# EAGLE board CT_schematic (EAGLE 7.6.0)

Size 100 x 80 mm. Coordinates in mm from the lower left corner, seen from the top.
Outline: 0,0 100,0 100,80 0,80 0,0
Copper layers (1*16): Top 0.035mm / dielectric 1.5mm / Bottom 0.035mm
Design rules "default": minimum track width 10mil, minimum drill 24mil, track to track 8mil, track to pad 8mil, pad to pad 8mil, via to via 8mil, smd to smd 8mil, copper to edge 40mil, drill to drill 8mil, minimum pad ring 10mil, minimum via ring 8mil, stop-mask expansion 4mil, vias tented up to drill 0mil, thermal gap 10mil

## Footprints (pad centres in the part's own frame; a part is rotated, then mirrored left to right if it is on the bottom)
C0603 = smd 0.8 x 0.8: 1 -0.762,0; 2 0.762,0
C0402 = smd 0.5 x 0.5: 1 -0.508,0; 2 0.508,0
C1210 = smd 1.2 x 2.5: 1 -1.524,0; 2 1.524,0
C0805 = smd 1.2 x 1.3: 1 -1.016,0; 2 1.016,0
C1206 = smd 1.3 x 1.6: 1 -1.524,0; 2 1.524,0
L0603 = smd 0.8 x 0.8: 1 -0.762,0; 2 0.762,0
L0806 = smd 1.016 x 1.524: 1 -0.889,0; 2 0.889,0
R0603 = smd 0.8 x 0.8: 1 -0.762,0; 2 0.762,0
LQFP144 = smd 0.35 x 1.35: 1 -8.75,-10.625; 2 -8.25,-10.625; 3 -7.75,-10.625; 4 -7.25,-10.625; 5 -6.75,-10.625; 6 -6.25,-10.625; 7 -5.75,-10.625; 8 -5.25,-10.625; 9 -4.75,-10.625; 10 -4.25,-10.625; 11 -3.75,-10.625; 12 -3.25,-10.625; 13 -2.75,-10.62; 14 -2.25,-10.625; 15 -1.75,-10.625; 16 -1.25,-10.625; 17 -0.75,-10.625; 18 -0.25,-10.625; 19 0.25,-10.625; 20 0.75,-10.625; 21 1.25,-10.625; 22 1.75,-10.625; 23 2.25,-10.625; 24 2.75,-10.62; 25 3.25,-10.625; 26 3.75,-10.625; 27 4.25,-10.625; 28 4.75,-10.625; 29 5.25,-10.625; 30 5.75,-10.625; 31 6.25,-10.625; 32 6.75,-10.625; 33 7.25,-10.625; 34 7.75,-10.625; 35 8.25,-10.625; 36 8.75,-10.625; 73 8.75,10.625; 74 8.25,10.625; 75 7.75,10.625; 76 7.25,10.625; 77 6.75,10.625; 78 6.25,10.625; 79 5.75,10.625; 80 5.25,10.625; 81 4.75,10.625; 82 4.25,10.625; 83 3.75,10.625; 84 3.25,10.625; 85 2.75,10.625; 86 2.25,10.625; 87 1.75,10.625; 88 1.25,10.625; 89 0.75,10.625; 90 0.25,10.625; 91 -0.25,10.625; 92 -0.75,10.625; 93 -1.25,10.625; 94 -1.75,10.625; 95 -2.25,10.625; 96 -2.75,10.625; 97 -3.25,10.625; 98 -3.75,10.625; 99 -4.25,10.625; 100 -4.75,10.625; 101 -5.25,10.625; 102 -5.75,10.625; 103 -6.25,10.625; 104 -6.75,10.625; 105 -7.25,10.625; 106 -7.75,10.625; 107 -8.25,10.625; 108 -8.75,10.625 | smd 1.35 x 0.35: 37 10.625,-8.75; 38 10.625,-8.25; 39 10.625,-7.75; 40 10.625,-7.25; 41 10.625,-6.75; 42 10.625,-6.25; 43 10.625,-5.75; 44 10.625,-5.25; 45 10.625,-4.75; 46 10.625,-4.25; 47 10.625,-3.75; 48 10.625,-3.25; 49 10.625,-2.75; 50 10.625,-2.25; 51 10.625,-1.75; 52 10.625,-1.25; 53 10.625,-0.75; 54 10.625,-0.25; 55 10.625,0.25; 56 10.625,0.75; 57 10.625,1.25; 58 10.625,1.75; 59 10.625,2.25; 60 10.625,2.75; 61 10.625,3.25; 62 10.625,3.75; 63 10.625,4.25; 64 10.625,4.75; 65 10.625,5.25; 66 10.625,5.75; 67 10.625,6.25; 68 10.625,6.75; 69 10.625,7.25; 70 10.625,7.75; 71 10.625,8.25; 72 10.625,8.75; 109 -10.625,8.75; 110 -10.625,8.25; 111 -10.625,7.75; 112 -10.625,7.25; 113 -10.625,6.75; 114 -10.625,6.25; 115 -10.625,5.75; 116 -10.625,5.25; 117 -10.625,4.75; 118 -10.625,4.25; 119 -10.625,3.75; 120 -10.625,3.25; 121 -10.625,2.75; 122 -10.625,2.25; 123 -10.625,1.75; 124 -10.625,1.25; 125 -10.625,0.75; 126 -10.625,0.25; 127 -10.625,-0.25; 128 -10.625,-0.75; 129 -10.625,-1.25; 130 -10.625,-1.75; 131 -10.625,-2.25; 132 -10.625,-2.75; 133 -10.625,-3.25; 134 -10.625,-3.75; 135 -10.625,-4.25; 136 -10.625,-4.75; 137 -10.625,-5.25; 138 -10.625,-5.75; 139 -10.625,-6.25; 140 -10.625,-6.75; 141 -10.625,-7.25; 142 -10.625,-7.75; 143 -10.625,-8.25; 144 -10.625,-8.75
LGA-16 = smd 1.5 x 0.4: 1 -2.1,0.975; 2 -2.1,0.325; 3 -2.1,-0.325; 4 -2.1,-0.975; 9 2.1,-0.975; 10 2.1,-0.325; 11 2.1,0.325; 12 2.1,0.975 | smd 0.4 x 1.5: 5 -0.975,-2.1; 6 -0.325,-2.1; 7 0.325,-2.1; 8 0.975,-2.1; 13 0.975,2.1; 14 0.325,2.1; 15 -0.325,2.1; 16 -0.975,2.1
VFBGA-63 = smd 0.4 x 0.4: A1 -3.6,4.4; A2 -2.8,4.4; A9 2.8,4.4; A10 3.6,4.4; B1 -3.6,3.6; B9 2.8,3.6; B10 3.6,3.6; C3 -2,2.8; C4 -1.2,2.8; C5 -0.4,2.8; C6 0.4,2.8; C7 1.2,2.8; C8 2,2.8; D3 -2,2; D4 -1.2,2; D5 -0.4,2; D6 0.4,2; D7 1.2,2; D8 2,2; E3 -2,1.2; E4 -1.2,1.2; E5 -0.4,1.2; E6 0.4,1.2; E7 1.2,1.2; E8 2,1.2; F3 -2,0.4; F4 -1.2,0.4; F5 -0.4,0.4; F6 0.4,0.4; F7 1.2,0.4; F8 2,0.4; G3 -2,-0.4; G4 -1.2,-0.4; G5 -0.4,-0.4; G6 0.4,-0.4; G7 1.2,-0.4; G8 2,-0.4; H3 -2,-1.2; H4 -1.2,-1.2; H5 -0.4,-1.2; H6 0.4,-1.2; H7 1.2,-1.2; H8 2,-1.2; J3 -2,-2; J4 -1.2,-2; J5 -0.4,-2; J6 0.4,-2; J7 1.2,-2; J8 2,-2; K3 -2,-2.8; K4 -1.2,-2.8; K5 -0.4,-2.8; K6 0.4,-2.8; K7 1.2,-2.8; K8 2,-2.8; L1 -3.6,-3.6; L2 -2.8,-3.6; L9 2.8,-3.6; L10 3.6,-3.6; M1 -3.6,-4.4; M2 -2.8,-4.4; M9 2.8,-4.4; M10 3.6,-4.4
FCI_10118193-0001LF = smd 0.4 x 1.35: 1 -1.3,2.675; 2 -0.65,2.675; 3 0,2.675; 4 0.65,2.675; 5 1.3,2.675 | smd 1.6 x 1.4: 6 -3.2,2.45; 7 3.2,2.45 | smd 1.9 x 1.9: 8 -1.2,0; 9 1.2,0 | hole 0.5: -3.3,0; 3.3,0
SOT143B = smd 1 x 0.7: 1 -0.75,-1 | smd 0.6 x 0.7: 2 0.95,-1; 3 0.95,1; 4 -0.95,1
QFN-28 = smd 0.813 x 0.305: 1 -2.451,1.5; 2 -2.451,1; 3 -2.451,0.5; 4 -2.451,0; 5 -2.451,-0.5; 6 -2.451,-1; 7 -2.451,-1.5; 15 2.451,-1.5; 16 2.451,-1; 17 2.451,-0.5; 18 2.451,0; 19 2.451,0.5; 20 2.451,1; 21 2.451,1.5 | smd 0.305 x 0.813: 8 -1.5,-2.451; 9 -1,-2.451; 10 -0.5,-2.451; 11 0,-2.451; 12 0.5,-2.451; 13 1,-2.451; 14 1.5,-2.451; 22 1.5,2.451; 23 1,2.451; 24 0.5,2.451; 25 0,2.451; 26 -0.5,2.451; 27 -1,2.451; 28 -1.5,2.451 | smd 3.607 x 3.607: 29 0,0
SJ-43515TS-SMT-TR = smd 2.2 x 3: 1 0.6,-7.4; 4 3.4,-7.4 | smd 3 x 3: 2 12.8,-7.4; 5 17,-3 | smd 2 x 3: 3 5.3,0; 6 2.5,0 | drill 1.8: P$7 4.5,-3.69; P$8 11.54,-3.69
ASEK = smd 1.4 x 1: 1 -1.1,-0.8; 2 1.1,-0.8; 3 1.1,0.8; 4 -1.1,0.8
ASFL1 = smd 1.7 x 1.5: 1 -1.27,-1.1; 2 1.27,-1.1; 3 1.27,1.1; 4 -1.27,1.1
WSON-8 = smd 0.3 x 0.6: 1 -0.75,0; 2 0.05,0; 3 0.85,0; 4 1.65,0; 5 1.65,3.8; 6 0.85,3.8; 7 0.05,3.8; 8 -0.75,3.8 | smd 3 x 2.6: PAD 0.45,1.9
TSOT-23-5 = smd 1.3 x 0.62: 1 -1.31,0.95; 2 -1.31,0; 3 -1.31,-0.95; 4 1.31,-0.95; 5 1.31,0.95
DFN8_2X3MC = smd 0.813 x 0.305: 1 -1.398,0.75; 2 -1.398,0.25; 3 -1.398,-0.25; 4 -1.398,-0.75; 5 1.398,-0.75; 6 1.398,-0.25; 7 1.398,0.25; 8 1.398,0.75 | smd 1.753 x 1.549: 9 0,0
JST-2-SMD = smd 1 x 4.6: 1 -1,-3.7; 2 1,-3.7 | smd 1.6 x 3.4: NC1 -3.4,1.5; NC2 3.4,1.5
SON-6 = smd 0.55 x 0.3: 1 -0.355,0.5 | smd 0.52 x 0.3: 2 -0.37,0; 3 -0.37,-0.5; 4 0.37,-0.5; 5 0.37,0; 6 0.37,0.5
SW_4-1437565-2 = smd 1.4 x 2.1: 1 -2.23,4.55; 2 -2.23,-4.55; 3 2.23,4.55; 4 2.23,-4.55
LGM67K-G1J2-24-Z = smd 0.8 x 1.4: A -2,0; C 0,0
NC7SZ125M5X = smd 1.3 x 0.7: 1 -1.3,0.95; 2 -1.3,0; 3 -1.3,-0.95; 4 1.3,-0.95; 5 1.3,0.95

## Placement (x,y rotation side)
C1  1e-06  [C0603]  -26.67,77.47 0 top  (outside the outline)
C2  1e-07  [C0603]  -30.48,77.47 0 top  (outside the outline)
C3  1e-07  [C0603]  -34.29,77.47 0 top  (outside the outline)
C4  1e-07  [C0603]  -38.1,77.47 0 top  (outside the outline)
C5  1e-07  [C0603]  -41.91,77.47 0 top  (outside the outline)
C6  1e-07  [C0603]  -45.72,77.47 0 top  (outside the outline)
C7  1e-07  [C0603]  -49.53,77.47 0 top  (outside the outline)
C8  1e-07  [C0603]  -53.34,77.47 0 top  (outside the outline)
C9  1e-07  [C0603]  -57.15,77.47 0 top  (outside the outline)
C10  1e-07  [C0603]  -60.96,77.47 0 top  (outside the outline)
C11  1e-07  [C0603]  -64.77,77.47 0 top  (outside the outline)
C12  1e-07  [C0603]  -68.58,77.47 0 top  (outside the outline)
C13  1e-07  [C0603]  -72.39,77.47 0 top  (outside the outline)
C14  4.7e-06  [C0603]  -15.24,77.47 0 top  (outside the outline)
C15  1e-08  [C0603]  -76.2,77.47 0 top  (outside the outline)
C16  1e-06  [C0603]  -15.24,82.55 0 top  (outside the outline)
C17  1e-08  [C0402]  -45.72,82.55 0 top  (outside the outline)
C18  1e-08  [C0402]  -49.53,82.55 0 top  (outside the outline)
C19  1e-08  [C0402]  -53.34,82.55 0 top  (outside the outline)
C20  4.7e-07  [C0603]  -19.05,77.47 0 top  (outside the outline)
C21  1e-07  [C0402]  -57.15,82.55 0 top  (outside the outline)
C22  1e-07  [C0402]  -60.96,82.55 0 top  (outside the outline)
C23  1e-07  [C0402]  -64.77,82.55 0 top  (outside the outline)
C24  1e-07  [C0402]  -68.58,82.55 0 top  (outside the outline)
C25  2.2e-06  [C0603]  -22.86,77.47 0 top  (outside the outline)
C26  2.2e-05  [C1210]  -24.13,60.96 0 top  (outside the outline)
C27  2.2e-05  [C1210]  -30.48,60.96 0 top  (outside the outline)
C28  1e-09  [C0402]  -72.39,82.55 0 top  (outside the outline)
C29  1e-09  [C0402]  -76.2,82.55 0 top  (outside the outline)
C30  1e-07  [C0402]  -15.24,87.63 0 top  (outside the outline)
C31  1e-07  [C0402]  -19.05,87.63 0 top  (outside the outline)
C32  1e-07  [C0402]  -22.86,87.63 0 top  (outside the outline)
C33  1e-07  [C0402]  -26.67,87.63 0 top  (outside the outline)
C34  1e-07  [C0402]  -30.48,87.63 0 top  (outside the outline)
C35  1e-05  [C0805]  -60.96,60.96 0 top  (outside the outline)
C36  1e-05  [C0805]  -66.04,60.96 0 top  (outside the outline)
C37  1e-05  [C0805]  -71.12,60.96 0 top  (outside the outline)
C38  1e-05  [C0805]  -76.2,60.96 0 top  (outside the outline)
C39  1e-05  [C0805]  -15.24,67.31 0 top  (outside the outline)
C40  1e-08  [C0402]  -34.29,87.63 0 top  (outside the outline)
C41  1e-08  [C0402]  -38.1,87.63 0 top  (outside the outline)
C42  1e-08  [C0402]  -41.91,87.63 0 top  (outside the outline)
C43  1e-06  [C0603]  -19.05,82.55 0 top  (outside the outline)
C44  1e-05  [C0805]  -20.32,67.31 0 top  (outside the outline)
C45  1e-05  [C0805]  -25.4,67.31 0 top  (outside the outline)
C46  1e-05  [C0805]  -30.48,67.31 0 top  (outside the outline)
C47  1e-07  [C0402]  -45.72,87.63 0 top  (outside the outline)
C48  1e-05  [C1206]  -36.83,60.96 0 top  (outside the outline)
C49  1e-05  [C1206]  -43.18,60.96 0 top  (outside the outline)
C50  1e-08  [C0402]  -49.53,87.63 0 top  (outside the outline)
F1  240.0  [L0603]  -22.86,82.55 0 top  (outside the outline)
I1  1.5e-06  [L0806]  -49.53,60.96 0 top  (outside the outline)
R2  1000.0  [R0603]  -26.67,82.55 0 top  (outside the outline)
R4  4700.0  [R0603]  -30.48,82.55 0 top  (outside the outline)
R5  10000.0  [R0603]  -73.66,66.04 0 top  (outside the outline)
R6  10000.0  [R0603]  -78.74,66.04 0 top  (outside the outline)
R7  10000.0  [R0603]  -15.24,72.39 0 top  (outside the outline)
R8  10000.0  [R0603]  -20.32,72.39 0 top  (outside the outline)
R9  10000.0  [R0603]  -25.4,72.39 0 top  (outside the outline)
R10  10000.0  [R0603]  -30.48,72.39 0 top  (outside the outline)
R11  10000.0  [R0603]  -35.56,72.39 0 top  (outside the outline)
R12  10000.0  [R0603]  -40.64,72.39 0 top  (outside the outline)
R13  47000.0  [R0603]  -45.72,72.39 0 top  (outside the outline)
R14  47000.0  [R0603]  -50.8,72.39 0 top  (outside the outline)
R15  47000.0  [R0603]  -55.88,72.39 0 top  (outside the outline)
R16  680.0  [R0603]  -34.29,82.55 0 top  (outside the outline)
R17  100000.0  [R0603]  -48.26,66.04 0 top  (outside the outline)
R18  36000.0  [R0603]  -60.96,72.39 0 top  (outside the outline)
R19  100000.0  [R0603]  -53.34,66.04 0 top  (outside the outline)
R20  220000.0  [R0603]  -58.42,66.04 0 top  (outside the outline)
R21  1000000.0  [R0603]  -43.18,66.04 0 top  (outside the outline)
R22  10000.0  [R0603]  -66.04,72.39 0 top  (outside the outline)
R23  10000.0  [R0603]  -71.12,72.39 0 top  (outside the outline)
R24  9100.0  [R0603]  -38.1,82.55 0 top  (outside the outline)
R25  680000.0  [R0603]  -63.5,66.04 0 top  (outside the outline)
R26  120000.0  [R0603]  -68.58,66.04 0 top  (outside the outline)
R27  2000.0  [R0603]  -41.91,82.55 0 top  (outside the outline)
R28  10000.0  [R0603]  -76.2,72.39 0 top  (outside the outline)
U1  stm32f103zgt6  [LQFP144]  -24.13,11.43 0 top  (outside the outline)
U2  l3g4200d  [LGA-16]  -63.5,52.07 0 top  (outside the outline)
U3  mt29f4g08abbdah4  [VFBGA-63]  -45.72,29.21 0 top  (outside the outline)
U4  10118193-0001LF  [FCI_10118193-0001LF]  -35.56,52.07 0 top  (outside the outline)
U5  prtr5v0u2ax  [SOT143B]  -62.23,87.63 0 top  (outside the outline)
U6  WM8731CLSEFL  [QFN-28]  -16.51,60.96 0 top  (outside the outline)
U7  SJ-43515TS-SMT-TR  [SJ-43515TS-SMT-TR]  -62.23,10.16 0 top  (outside the outline)
U8  SJ-43515TS-SMT-TR  [SJ-43515TS-SMT-TR]  -39.37,33.02 0 top  (outside the outline)
U9  ASEK-32.768KHz-ECST  [ASEK]  -57.15,53.34 0 top  (outside the outline)
U10  ASFL1-12.288MHZ-EC-T  [ASFL1]  -64.77,43.18 0 top  (outside the outline)
U11  ASFL1-25MHZ-NCS  [ASFL1]  -26.67,53.34 0 top  (outside the outline)
U12  LP2951ACSDX/NOPB  [WSON-8]  -44.45,40.64 0 top  (outside the outline)
U13  ltc3406es5  [TSOT-23-5]  -35.56,66.04 0 top  (outside the outline)
U14  MCP73831T-2ACI/MC  [DFN8_2X3MC]  -72.39,86.36 0 top  (outside the outline)
U15  S2B-PH-SM4-TB(LF)(SN)  [JST-2-SMD]  -22.86,44.45 0 top  (outside the outline)
U16  TPS3895ADRYR  [SON-6]  -66.04,86.36 0 top  (outside the outline)
U17  4-1437565-2  [SW_4-1437565-2]  -66.04,29.21 0 top  (outside the outline)
U18  Q65110A2395  [LGM67K-G1J2-24-Z]  -71.12,52.07 0 top  (outside the outline)
U19  nc7sz125m5x  [NC7SZ125M5X]  -54.61,59.69 0 top  (outside the outline)

## Library data of the parts
C1-C50 F1 I1 R2 R4-R28 U1-U19 = circuit_tree

## Nets
CLK_U1_8: U1.8 U9.3
CLK_U1_23: U1.23 U11.3
CLK_U6_1: U6.1 U10.3
GND: C1.2 C2.2 C3.2 C4.2 C5.2 C6.2 C7.2 C8.2 C9.2 C10.2 C11.2 C12.2 C13.2 C14.2 C15.2 C16.2 C17.2 C18.2 C19.2 C21.2 C22.2 C23.2 C24.2 C25.2 C29.2 C30.2 C31.2 C32.2 C33.2 C34.2 C35.2 C36.2 C37.2 C38.2 C39.2 C40.2 C41.2 C42.2 C43.2 C44.2 C45.2 C46.1 C46.2 C47.2 C48.2 C49.2 C50.2 R2.2 R5.2 R6.1 R6.2 R13.2 R14.2 R15.2 R19.2 R20.2 R24.2 R26.2 R27.2 U1.16 U1.30 U1.31 U1.38 U1.51 U1.61 U1.71 U1.83 U1.94 U1.107 U1.120 U1.130 U1.143 U2.8 U2.9 U2.10 U2.11 U2.12 U2.13 U3.C5 U3.F7 U3.K3 U3.K8 U4.5 U4.6 U4.7 U4.8 U4.9 U5.1 U6.4 U6.15 U6.19 U6.25 U6.26 U6.29 U7.1 U8.1 U9.2 U10.2 U11.2 U12.3 U12.4 U12.PAD U13.2 U14.6 U14.9 U15.2 U16.2 U18.C U19.1 U19.3
INPUT_USBPOWER_5V: C48.1 R28.2 U4.1 U5.4 U14.1 U14.2
NET_U1_25: R4.1 U1.25 U19.4
NET_U1_33: C15.1 C16.1 F1.1 U1.32 U1.33
NET_U1_138: R5.1 U1.138
NET_U1_141: U18.A
NET_U1_142: U17.3 U17.4
NET_U2_14: C19.1 C20.1 U2.14
NET_U2_ATNET_1: C20.2
NET_U3_C3: R12.1 U3.C3
NET_U3_C6: R9.1 U3.C6
NET_U3_C7: R10.1 U3.C7
NET_U3_C8: R8.1 U3.C8
NET_U3_D4: R11.1 U3.D4
NET_U6_9: U6.9
NET_U6_20: C34.1 C39.1 U6.20
NET_U7_2: C27.1 R14.1 U7.2
NET_U7_5: C26.1 R13.1 U7.5
NET_U7_13: C26.2
NET_U7_14: C27.2
NET_U8_5: C28.1 C29.1 R15.1 R16.1 U8.5
NET_U8_21: R16.2
NET_U8_22: C28.2
NET_U12_5: R17.1 U12.5
NET_U12_7: R18.2 R19.1 U12.7
NET_U13_1: U13.1
NET_U13_3: I1.1 U13.3
NET_U13_5: R20.1 R21.1 U13.5
NET_U13_ATNET_3: I1.2 R21.2
NET_U14_5: R28.1 U14.5
NET_U14_8: R27.1 U14.8
NET_U16_1: R23.1 R24.1 U16.1
NET_U16_3: R25.2 R26.1 U16.3
NET_U16_4: R22.1 U16.4 U19.2
NET_U17_1: R2.1 U17.1 U17.2
PROC_I2S2_CK: U1.74 U6.7
PROC_I2S2_SD: U1.76 U6.8
PROC_I2S2_WS: U1.73 U6.9 U6.11
PROC_SPI1_MISO: U1.42 U2.4
PROC_SPI1_MOSI: U1.43 U2.3
PROC_SPI1_NSS: R7.1 U1.40 U2.5
PROC_SPI1_SCK: U1.41 U2.2
PROC_USB_DM: U1.103 U4.2 U5.3
PROC_USB_DP: U1.104 U4.3 U5.2
VCC_S1_3V7: C43.1 C45.1 C49.1 U12.8 U13.4 U14.3 U14.4 U15.1
VCC_TIER1_1V8: C21.1 C22.1 C23.1 C24.1 C25.1 C30.1 C32.1 C33.1 C35.1 C37.1 C38.1 C44.1 C50.1 R8.2 R9.2 R10.2 R11.2 R12.2 R17.2 R18.1 U3.D3 U3.G4 U3.H8 U3.J6 U6.5 U6.12 U6.18 U12.1 U19.5
VCC_TIER1_3V3: C1.1 C2.1 C3.1 C4.1 C5.1 C6.1 C7.1 C8.1 C9.1 C10.1 C11.1 C12.1 C13.1 C14.1 C17.1 C18.1 C31.1 C36.1 C40.1 C41.1 C42.1 C46.2 C47.1 F1.2 I1.2 R4.2 R7.2 R21.2 R22.2 R23.2 R25.1 U1.6 U1.17 U1.39 U1.52 U1.62 U1.72 U1.84 U1.95 U1.108 U1.121 U1.131 U1.144 U2.1 U2.15 U2.16 U6.3 U9.4 U10.4 U11.4 U16.6

## Tracks (layer width: path | path; a pad name or v marks a point on that pad's centre or on a via)
CLK_U1_8  (1 unrouted)
CLK_U1_23  (1 unrouted)
CLK_U6_1  (1 unrouted)
GND  (109 unrouted)
INPUT_USBPOWER_5V  (5 unrouted)
NET_U1_25  (2 unrouted)
NET_U1_33  (4 unrouted)
NET_U1_138  (1 unrouted)
NET_U1_142  (1 unrouted)
NET_U2_14  (2 unrouted)
NET_U3_C3  (1 unrouted)
NET_U3_C6  (1 unrouted)
NET_U3_C7  (1 unrouted)
NET_U3_C8  (1 unrouted)
NET_U3_D4  (1 unrouted)
NET_U6_20  (2 unrouted)
NET_U7_2  (2 unrouted)
NET_U7_5  (2 unrouted)
NET_U8_5  (4 unrouted)
NET_U12_5  (1 unrouted)
NET_U12_7  (2 unrouted)
NET_U13_3  (1 unrouted)
NET_U13_5  (2 unrouted)
NET_U13_ATNET_3  (1 unrouted)
NET_U14_5  (1 unrouted)
NET_U14_8  (1 unrouted)
NET_U16_1  (2 unrouted)
NET_U16_3  (2 unrouted)
NET_U16_4  (2 unrouted)
NET_U17_1  (2 unrouted)
PROC_I2S2_CK  (1 unrouted)
PROC_I2S2_SD  (1 unrouted)
PROC_I2S2_WS  (2 unrouted)
PROC_SPI1_MISO  (1 unrouted)
PROC_SPI1_MOSI  (1 unrouted)
PROC_SPI1_NSS  (2 unrouted)
PROC_SPI1_SCK  (1 unrouted)
PROC_USB_DM  (2 unrouted)
PROC_USB_DP  (2 unrouted)
VCC_S1_3V7  (7 unrouted)
VCC_TIER1_1V8  (28 unrouted)
VCC_TIER1_3V3  (50 unrouted)